# Altium PCB PCB1.PcbDoc
Units mil, origin at the board's own origin, x right, y up, seen from the top; angles counter-clockwise.
Board outline 1579.83 x 2288.5 mil, 2 copper layers (Top Layer, Bottom Layer); 91 components, 54 nets, 254 pads, 104 vias.
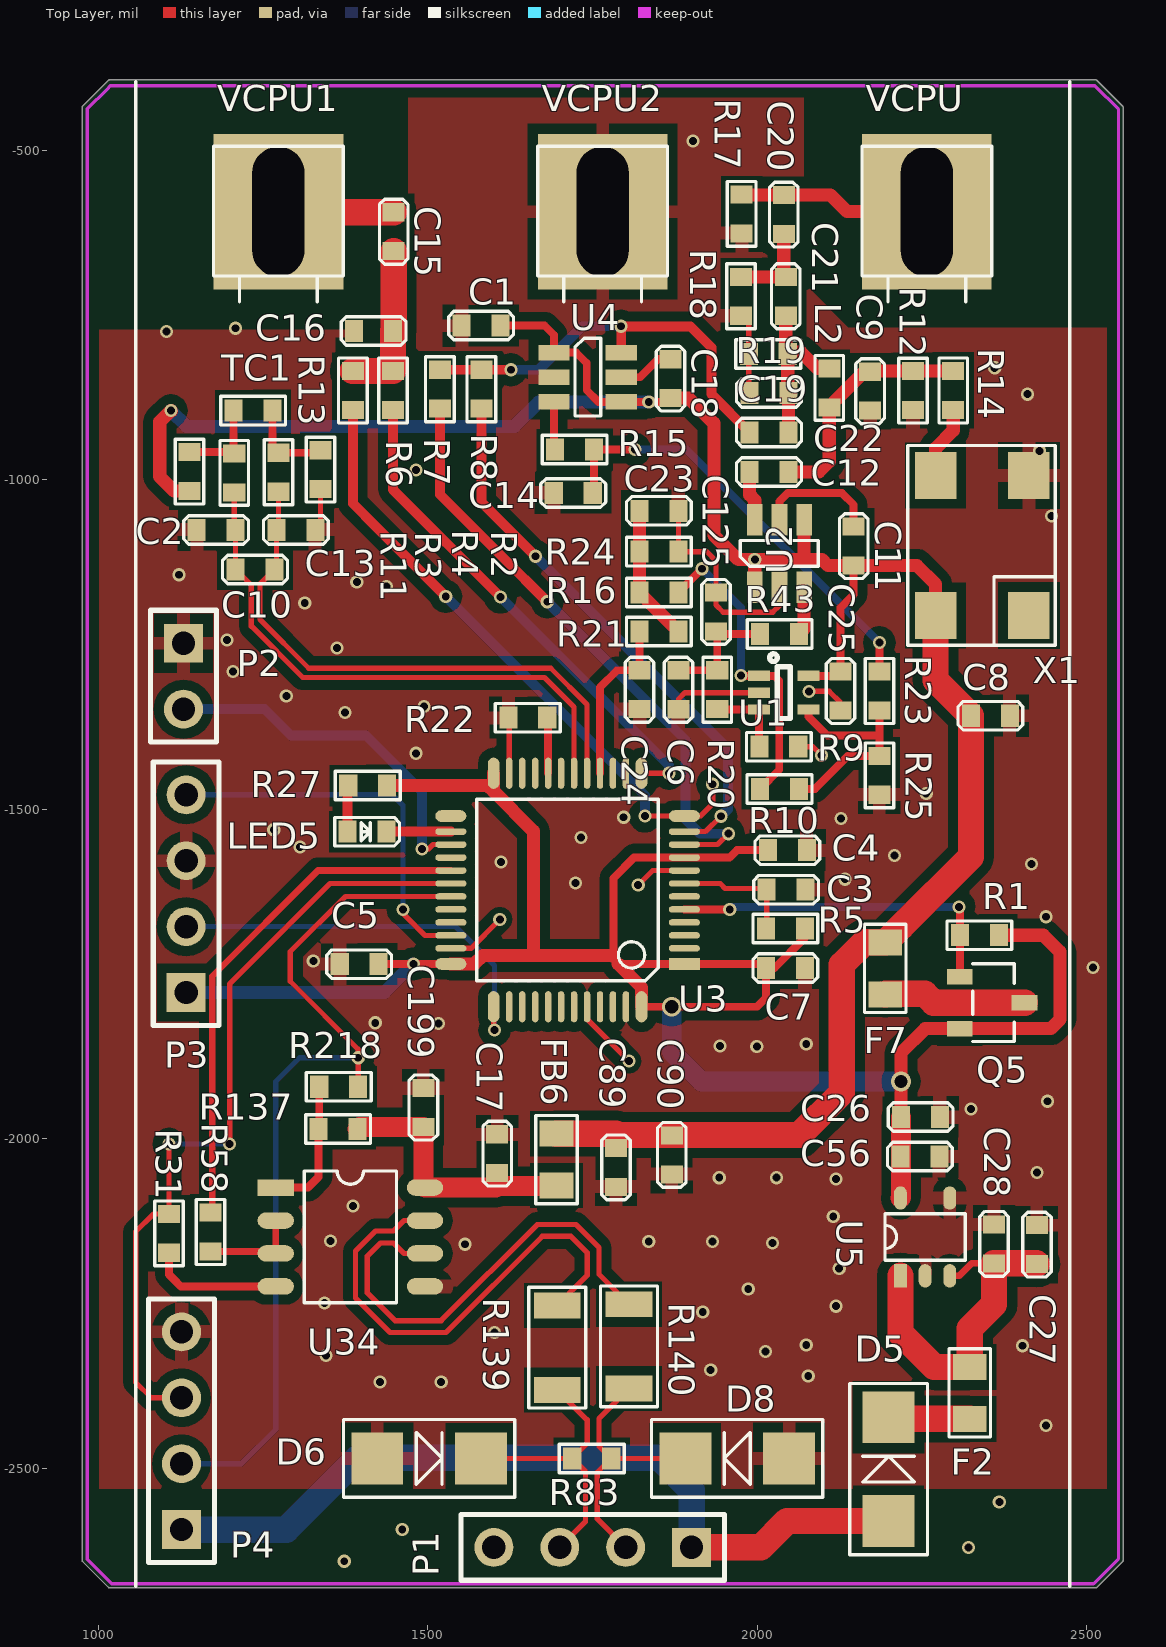
[diagram p0: Top Layer view]
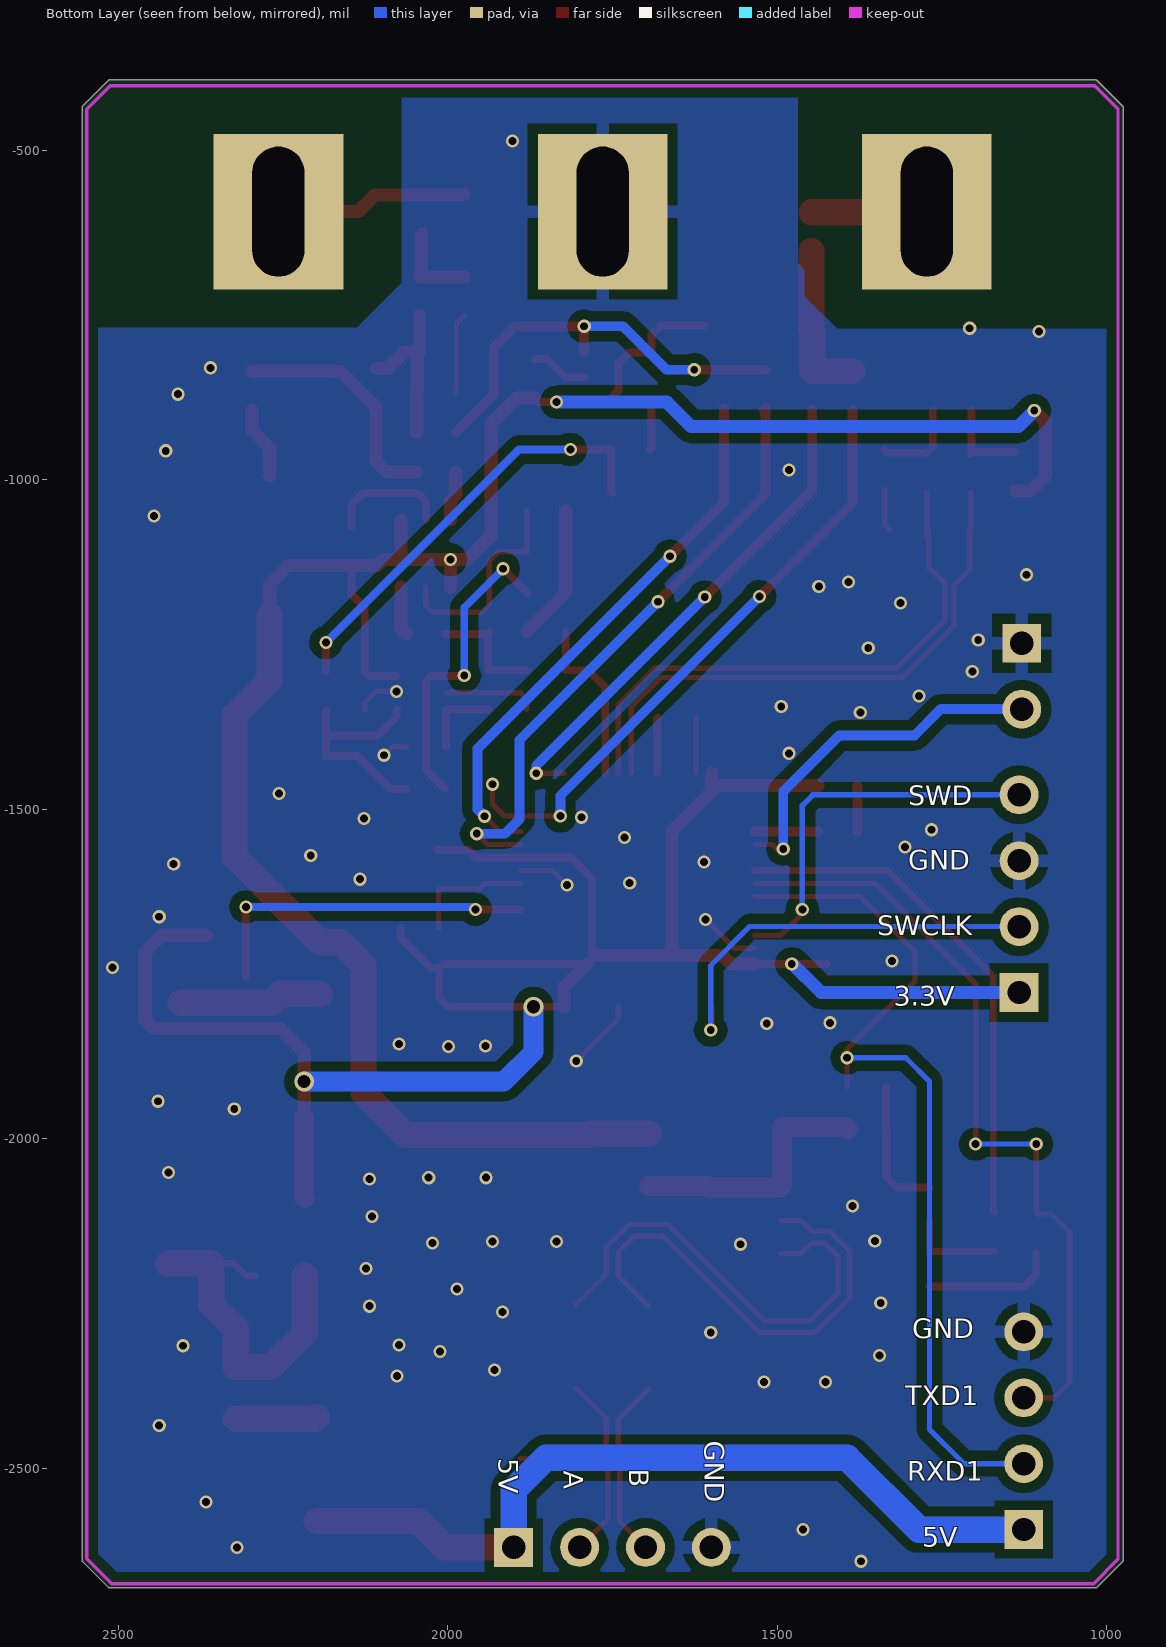
[diagram p1: Bottom Layer view, seen from below]

## Layer stack, top to bottom
Top Layer: signal copper 1.4
Dielectric: dielectric 12.6, FR-4, Dk 4.8
Bottom Layer: signal copper 1.4

## Board outline
975.11,-2639.63 ccw(c977.63,-2639.63) 975.85,-2641.41 1015.22,-2680.78 ccw(c1017,-2679) 1017,-2681.52 2513.06,-2681.52 ccw(c2513.06,-2679) 2514.84,-2680.78 2554.21,-2641.41 ccw(c2552.43,-2639.63) 2554.95,-2639.63 2554.95,-434.9 ccw(c2552.43,-434.9) 2554.21,-433.13 2514.84,-393.76 ccw(c2513.06,-395.53) 2513.06,-393.02 1017,-393.02 ccw(c1017,-395.53) 1015.22,-393.76 975.85,-433.13 ccw(c977.63,-434.9) 975.11,-434.9

## Design rules (kind name [scope] priority, off if disabled: settings)
Clearance Clearance_2 [InNet('+5V')  And InPolygon] p1: gap=12
Clearance Clearance_1 [InPoly And InNet(AGND)] p2: gap=15
Clearance [All] p3: gap=5
DiffPairsRouting [All] p1: maxlimit=10 minlimit=10 mostfreqgap=10 maxuncoupledlength=500
MinimumSolderMaskSliver [All] p1: minsoldermaskwidth=1
PolygonConnect PolygonConnect_1 [IsVia] p1: connectstyle=Direct reliefconductorwidth=10 reliefentries=4 polygonreliefangle="90 Angle"
PolygonConnect [All] p2: connectstyle=Relief reliefconductorwidth=20 reliefentries=4 polygonreliefangle="90 Angle"
RoutingVias [All] p1: holewidth=28 width=50 viastyle="Through Hole" minholewidth=28 minwidth=50 maxholewidth=28 maxwidth=50
SilkToSilkClearance [All] p1: silktosilkclearance=1
SilkscreenOverComponentPads [All] p1: minsilkscreentomaskgap=1
SolderMaskExpansion [All] p1: expansion=4
Width [All] p1: maxlimit=200 minlimit=6 preferedwidth=10
24 further rules are at their usual default settings.

## Classes and differential pairs
component class Sheet1: C1 C2 C6 C8 C9 C10 C11 C12 C13 C14 C15 C16 C18 C19 C20 C21 C22 C23 C24 C25 C125 L2 R2 R3 R4 R6 R7 R8 R9 R10 R11 R12 R13 R14 R15 R16 R17 R18 R19 R20 R21 R23 R24 R25 R43 TC1 U1 U2 U4 VCPU VCPU1 VCPU2 X1
differential pair 4852: +4852_P -4852_N
differential pair 485: +485_P -485_N

## Components (designator, comment, footprint, x,y, rotation, side; value= is the part's Value field where it differs from the comment)
C1 "0.1uF/25V" 0603C 1551,-766 r0 top
C2 "0.1uF/25V" 0603c 1208,-1076 r180 top
C3 "0.1uF/25V" 0603C 2073,-1622 r180 top
C4 "0.1uF/25V" 0603C 2075,-1562 r180 top
C5 "0.1uF/25V" 0603C 1366,-1735 r0 top
C6 "0.01uF/25V" 0603C 1880,-1289 r270 top
C7 "0.1uF/25V" 0603C 2072,-1741 r180 top
C8 "0.1uF/25V" 0603C 2324,-1358 r0 top
C9 "22pF" 0603C 2171,-895 r90 top
C10 "1uF" 0603c 1208,-1136 r0 top
C11 "0.1uF/25V" 0603C 2146,-1130 r90 top
C12 "220pF" 0603C 2047,-988 r180 top
C13 "0.1uF/25V" 0603c 1270,-1076 r0 top
C14 "0.1uF/25V" 0603C 1750,-1020 r180 top
C15 "10pF" 0603C 1448,-653 r90 top
C16 "100PF" 0603C 1447,-774 r180 top
C17 "10uF/25V" 0603C 1605,-1993 r270 top
C18 "0.1uF/25V" 0603C 1868,-876 r90 top
C19 "15pF" 0603C 2047,-868 r180 top
C20 "4700pF" 0603C 2040,-568 r270 top
C21 "4700pF" 0603C 2043,-692 r270 top
C22 "220pF" 0603C 2047,-928 r180 top
C23 "0.01uF/25V" 0603C 1880,-1047 r180 top
C24 "0.01uF/25V" 0603C 1821,-1348 r90 top
C25 "0.1uF/25V" 0603C 2126,-1350 r90 top
C26 "10uF/25V" 0603C 2277,-1967 r180 top
C27 "10uF/25V" 0603C 2424,-2131 r270 top
C28 "0.1uF/25V" 0603C 2359,-2189 r90 top
C56 "0.1uF/25V" 0603C 2217,-2027 r0 top
C89 "10uF/25V" 0603C 1785.23,-2073 r90 top
C90 "0.01uF" 0603C 1870,-2054 r90 top
C125 "0.1uF/25V" 0603C 1937,-1230 r90 top
C199 "0.01uF" 0603C 1493,-1923 r270 top
D5 "SS24" SMA 2199,-2580 r90 top
D6 "SMAJ6.5CA" SMA 1423,-2485 r0 top
D8 "SMAJ6.5CA" SMA 2048,-2485 r180 top
F2 "SMD0805P050" 0805R 2322,-2425 r90 top
F7 "SMD0805P020" 0805R 2194,-1702 r270 top
FB6 "JWWBW2012 M600HT" 0805CZ 1695,-2071 r90 top
L2 "100nH" 0603R 2109,-831 r270 top
LED5 "LED" 0603LED 1378,-1534 r0 top
P1 "Header 4" HDR1X4 1900,-2620 r180 top
P2 "Header 2" HDR1X2 1129,-1248 r270 top
P3 "Header 4" HDR1X4 1133,-1778 r90 top locked
P4 "Header 4" HDR1X4 1126,-2593 r90 top
Q5 "si2343" SOT23-3 2307,-1754 r180 top
R1 "10k" 0603r 2366.31,-1691 r180 top
R2 "499/1%" 0603r 1337,-955 r270 top
R3 "499/1%" 0603r 1206,-1019 r90 top
R4 "499/1%" 0603r 1273,-1018 r90 top
R5 "10K" 0603R 2072,-1681 r180 top
R6 "510" 0603R 1447,-894 r90 top
R7 "100" 0603R 1518,-892 r90 top
R8 "510" 0603R 1581,-892 r90 top
R9 "150K" 0603R 2062,-1405 r180 top
R10 "100K" 0603R 2063,-1469 r180 top
R11 "499/1%" 0603r 1138,-958 r270 top
R12 "51K" 0603r 2236,-835 r270 top
R13 "100" 0603R 1386,-894 r90 top
R14 "150K" 0603r 2297,-894 r90 top
R15 "68K" 0603r 1752,-954 r180 top
R16 "100" 0603R 1880,-1171 r180 top
R17 "10K" 0603r 1976,-567 r270 top
R18 "51K" 0603r 1975,-692 r270 top
R19 "100K" 0603r 2046,-809 r180 top
R20 "51K" 0603R 1939,-1348 r90 top
R21 "100" 0603R 1880,-1230 r180 top
R22 "10K" 0603R 1681,-1361 r180 top
R23 "51K" 0603R 2185,-1350 r90 top
R24 "150K" 0603R 1880,-1109 r180 top
R25 "51K/NC" 0603R 2185,-1478 r90 top
R27 "1K" 0603R 1379,-1464 r0 top
R31 "1K" 0603R 1107,-2173 r90 top
R43 "68K" 0603r 2004,-1234 r0 top
R58 "1K" 0603R 1170,-2171 r90 top
R83 "100" 0603R 1778,-2485 r180 top
R137 "100k" 0603R 1334,-1985 r0 top
R139 "10" 1206R 1696,-2381 r90 top
R140 "10" 1206R 1805,-2379 r90 top
R218 "1K" 0603R 1335,-1921 r0 top
TC1 "THERMOCOUPLE" 0603R 1205,-895 r0 top
U1 "OPA837 DCK" SC70-5 2040,-1323 r0 top
U2 "ltc5507es6" SOT23-6 1996,-1163 r0 top
U3 "STM32F103C8T6" TQFP-48 1889,-1711 r180 top
U4 "ltc5507es6" SOT23-6 1691,-807 r270 top
U5 "TLV70233DBVR" SOT23-5(DBV) 2217,-2208 r90 top
U34 "THVD1500" so-8 1269,-2074 r0 top
VCPU "VCPU" probe 2257,-593 r0 top locked
VCPU1 "VCPU" probe 1273,-593 r0 top locked
VCPU2 "VCPU" probe 1765,-593 r0 top locked
X1 "PXETCLJANF-80.000000" XTAL4TN_7050 2412,-1206 r90 top

## Footprints (in the part's own frame and the unit in brackets; to place one, negate y for a bottom-side part, rotate by r counter-clockwise, add the part's x,y. Pads: shape width x height; smd on the part's side, far side on the other; paste and mask are expansions set on the pad)
0603C [mm]
  rect 0.7x0.85 smd: 1(0,0) 2(1.5,0)
  silkscreen extent -0.5,-0.55 2,0.55
0603c [mm]
  rect 0.7x0.85 smd: 1(0,0) 2(1.5,0)
  silkscreen extent -0.5,-0.55 2,0.55
0603LED [mm]
  rect 0.7x0.85 smd: 1(0,0) 2(1.5,0)
  silkscreen extent -0.5,-0.55 2,0.55
0603R [mm]
  rect 0.7x0.85 smd: 1(0,0) 2(1.5,0)
  silkscreen extent -0.5,-0.55 2,0.55
0603r [mm]
  rect 0.7x0.85 smd: 1(0,0) 2(1.5,0)
  silkscreen extent -0.5,-0.55 2,0.55
0805CZ [mm]
  rect 1x1.3 smd: 1(0,0) 2(2,0)
  silkscreen extent -0.7,-0.8 2.7,0.8
0805R [mm]
  rect 1x1.3 smd: 1(0,0) 2(2,0)
  silkscreen extent -0.7,-0.8 2.7,0.8
1206R [mm]
  rect 1x1.8 smd: 1(0,0) 2(3.25,0)
  silkscreen extent -0.7,-1.1 3.95,1.1
HDR1X2 [mm] "Connector; Header; 2 Position"
  rect 1.5x1.5 hole 0.9: 1(0,0)
  round 1.5 hole 0.9: 2(2.54,0)
  silkscreen extent -1.27,-1.27 3.81,1.27
HDR1X4 [mm] "Connector; Header; 4 Position"
  rect 1.5x1.5 hole 0.9: 1(0,0)
  round 1.5 hole 0.9: 2(2.54,0) 3(5.08,0) 4(7.62,0)
  silkscreen extent -1.27,-1.27 8.89,1.27
probe [mm]
  rect 5x6 hole 2 slot 5 at 90 deg unplated: 1(0,0)
SC70-5 [mm] "SC70 6-Leads, Body 2.0x1.25mm, Pitch 0.65mm"
  rect 0.85x0.4 smd mask+0.05: 1(-0.95,0.65) 2(-0.95,0) 3(-0.95,-0.65) 4(0.95,-0.65) 5(0.95,0.65)
  silkscreen extent -0.55,-1 0.25,1.5, body extent -0.63,-1 0.63,1, height 1.45
SMA [mm]
  rect 2x2 smd: 1(0,0) 2(4,0)
  silkscreen extent -1.3,-1.5 5.3,1.5
so-8 [mil]
  rect 55x25 smd: 1(0,0)
  oval 55x25 smd: 2(0,-50) 3(0,-100) 4(0,-150) 5(226.38,-150) 6(226.38,-100) 7(226.38,-50) 8(226.38,0)
  silkscreen extent 43,-175 183,25
SOT23-3 [mm]
  rect 1x0.6 smd: 1(0,0) 2(0,2) 3(-2.5,1)
  silkscreen extent -2.1,-0.5 -0.5,2.5
SOT23-5(DBV) [mm]
  rect 0.9x0.5 smd: 1(0,0)
  oval 0.9x0.5 smd: 2(0,-0.95) 3(0,-1.9) 4(3,-1.9) 5(3,0)
  silkscreen extent 0.6,-2.5 2.4,0.6
SOT23-6 [mm]
  rect 0.6x1.2 smd: 1(0,0) 2(0.95,0) 3(1.9,0) 4(1.9,2.6) 5(0.95,2.6) 6(0,2.6)
  silkscreen extent -0.56,0.81 2.44,1.8
TQFP-48 [mm]
  rect 1.2x0.45 smd: 1(0,0.6)
  oval 1.2x0.25 smd: 2(0,0) 3(0,-0.5) 4(0,-1) 5(0,-1.5) 6(0,-2) 7(0,-2.5) 8(0,-3) 9(0,-3.5) 10(0,-4) 11(0,-4.5) 26(9,-4.5) 27(9,-4) 28(9,-3.5) 29(9,-3) 30(9,-2.5) 31(9,-2) 32(9,-1.5) 33(9,-1) 34(9,-0.5) 35(9,0)
  oval 1.2x0.45 smd: 12(0,-5.1) 25(9,-5.1) 36(9,0.6)
  oval 0.45x1.2 smd: 13(1.65,-6.75) 24(7.35,-6.75) 37(7.35,2.25) 48(1.65,2.25)
  oval 0.25x1.2 smd: 14(2.25,-6.75) 15(2.75,-6.75) 16(3.25,-6.75) 17(3.75,-6.75) 18(4.25,-6.75) 19(4.75,-6.75) 20(5.25,-6.75) 21(5.75,-6.75) 22(6.25,-6.75) 23(6.75,-6.75) 38(6.75,2.25) 39(6.25,2.25) 40(5.75,2.25) 41(5.25,2.25) 42(4.75,2.25) 43(4.25,2.25) 44(3.75,2.25) 45(3.25,2.25) 46(2.75,2.25) 47(2.25,2.25)
  silkscreen extent 1,-5.75 8,1.25
XTAL4TN_7050 [mm]
  rect 1.8x1.6 smd: 1(0,0) 2(5.4,0) 3(5.4,3.6) 4(0,3.6)
  silkscreen extent -1.14,-1.02 6.55,4.67

## Part data
C1 C2 C3 C4 C5 C6 C7 C8 C10 C13 C15 C16 C23 C24 C25: library part CAP, "Capacitor"
C9 C11 C12 C14 C17 C18 C19 C20 C21 C22 C89 C90 C125 C199: library part C, "C"
C26 C27 C28 C56: library part Cap, "Capacitor"
D5: library part "Diode 1N4148", "High Conductance Fast Diode"
D6 D8: library part "DIODE S", "Schottky Diode"
F2: library part "Fuse 2", "Fuse"
F7: library part "Fuse 1", "Fuse"
FB6: library part FB
L2: library part INDUCTOR_1
P1 P3 P4: "Header, 4-Pin"
P2: "Header, 2-Pin"
Q5: library part BUK92150-55A, "BUK92150-55A"
R1: library part Res1, "Resistor"
R2 R3 R4 R11 R27: library part RES1
R5 R6 R7 R8 R9 R13 R20 R22 R23 R25: library part Res3, "Resistor"
R10 R12 R14 R15 R16 R17 R18 R19 R21 R24 R31 R43 R58 R83 R218: library part R, "R"
R137 R139 R140: library part RES2
U3: "STM32 ARM-based 32-bit MCU with 64 Kbytes Flash, 48-pin LQFP, Industrial Temperature"
U5: library part TLV70230DBVR
U34: library part SN65HVD06D
VCPU VCPU1 VCPU2: library part T_POINT_R
X1: library part XTAL4S

## Via types
v1: diameter 20, hole 12, Top Layer to Bottom Layer, tented both sides, 102 vias
v2: diameter 30, hole 20, Top Layer to Bottom Layer, tented both sides, 2 vias

## Nets (pads, with @x,y where several pads share a name; then routed paths per layer and width w, separated by ;. In a path a pad name is that pad's centre, name@x,y a point inside that pad or via, vN(x,y) a via of type N, cw(c..) or ccw(c..) an arc to the next point about the centre after c; other vN are vias at no path point)
485_3.3V1: C17.2 C199.2 FB6.1 R137.2 U34.8 | length 395
  Top Layer w30: R137.2 1396,-1982.06 C199.2 1493,-2071.62 U34.8 1602.74,-2074 1605,-2071.74 1694.26,-2071.74 FB6.1
485_EN1: R58.2 U3.29 | length 788.2
  Top Layer w10: R58.2 1172.53,-2109.42 1172.53,-1753.47 1333.11,-1592.89 U3.29
485_N: D6.2 P1.3 R83.2 R139.1 | length 430.1
  Top Layer w8: D6.2 R83.2 ; R139.1 1741.5,-2426.5 1741.5,-2462.44 R83.2 ; P1.3 1739,-2581 1739,-2505.06 R83.2
485_P: D8.2 P1.2 R83.1 R140.1 | length 419.5
  Top Layer w8: 1759.5,-2462 1759.5,-2449 ; P1.2 1757,-2577 1757,-2506 R83.1 ; R140.1 1759.5,-2424.5 1759.5,-2449 ; D8.2 R83.1 ; 1759.5,-2449 1759.5,-2466.5 R83.1
4852_N: R140.2 U34.6 | length 707
  Top Layer w8: U34.6 1463.77,-2174 1447.77,-2158 1428,-2158 1408,-2178 1408,-2234 1450,-2276 1520,-2276 1666,-2130 1724.46,-2130 1759.5,-2165.04 1759.5,-2205.55 R140.2
4852_P: R139.2 U34.7 | length 738.9
  Top Layer w8: U34.7 1463.77,-2124 1447.77,-2140 1420.54,-2140 1390,-2170.54 1390,-2241.46 1442.54,-2294 1527.46,-2294 1673.46,-2148 1717,-2148 1741.5,-2172.5 1741.5,-2207.55 R139.2
AGND: C1.1 C2.2 C3.1 C4.1 C5.1 C6.2 C7.1 C8.2 C9.1 C13.2 C14.2 C16.2 C17.1 C19.2 C23.1 C24.1 C25.1 C26.1 C27.1 C28.2 C56.2 C89.1 C90.1 C125.2 C199.1 D6.1 D8.1 P1.4 P2.1 P3.3 P4.4 R2.2 R9.1 R12.2 R17.2 R18.2 R19.2 R22.2 R24.1 R25.1 U1.2 U2.2 U3.8 U3.23 U3.35 U3.44 U3.47 U4.2 U5.2 U5.4 U34.5 VCPU2.1 X1.2 | length 1151
  Top Layer w8: C13.2 1337,-1068.06 R2.2 ; 1559,-1711 U3.35 1565,-1711 v1(1609,-1667) ; R22.2 1623.25,-1362.31 U3.23 ; U3.44 1741.36,-1818.36 v1(1805,-1882) ; v1(1819,-1615) 1841.11,-1592.89 U3.8 ; C6.2 1880,-1333 1890,-1323 U1.2 ; C23.1 R24.1 1923,-1109 1937,-1123 C125.2 1937,-1190 1948,-1201 2023,-1201 2033.4,-1190.6 U2.2 ; R18.2 1986.94,-763 R19.2 1986.94,-867 C19.2 ; R9.1 2084,-1405 v1(2097,-1418) ; v1(2078,-1321) 2109,-1321 2126,-1338 C25.1
  other v1: 1373,-2641 2320,-2620 1461,-2593 2367,-2551 2438,-2435 1427,-2369 1520,-2369 2077,-2360 1929,-2351 1345,-2329 2012,-2323 2402,-2314 2074,-2313 1601,-2294 1917,-2263 2119,-2254 1343,-2249 1986,-2228 2124,-2197 1556,-2160 2023,-2158 1835,-2156 1932,-2156 1352,-2155 2115,-2118 1386,-2102 2119,-2061 1942,-2059 2029,-2059 2424,-2051 2324,-1955 2440,-1943 1999,-1860 1943,-1859 2074,-1856 1516,-1825 1420,-1824 2509,-1740 1326,-1730 2438,-1663 1724,-1612 2133,-1606 2416,-1583 1611,-1580 2208,-1570 1306,-1557.01 1732,-1543 1266,-1531 2127,-1514 1797,-1512 2256,-1476 1482,-1415 1374,-1353 1494,-1344 1285,-1328 1204,-1291 1362,-1255 1195,-1243 1313,-1187 1437,-1162 1392,-1155 1122,-1144 2446,-1055 1482,-985 2428,-956 2409.63,-870.01 2360,-830 1103,-775 1208,-770 1902,-485.89
FB_B: C15.1 C16.1 R6.2 R13.2 | length 243.4
  Top Layer w40: R13.2 R6.2 C16.1 1448,-773 C15.1
FDR_ADC_A: C24.2 R21.2 U3.16 | length 260
  Top Layer w12: U3.16 1761.05,-1360 1761.05,-1314.95 1787.06,-1288.94 C24.2 C24.2 R21.2
NetC3_2: C3.2 R5.2 U3.7 | length 188.3
  Top Layer w8: U3.7 1943.57,-1612.57 1951,-1620 2011.94,-1620 C3.2 2013.94,-1680 R5.2
NetC9_2: C9.2 C12.1 L2.2 R12.1 R14.2 | length 362
  Top Layer w20: C12.1 2093,-988 2109,-972 L2.2 2109,-889 2162.06,-835.94 C9.2 2171.94,-835 R12.1 2236.06,-834.94 R14.2
NetC11_2: C11.2 U2.5 | length 186.3
  Top Layer w12: U2.5 2033.4,-1032.6 2046,-1020 2128,-1020 2146,-1038 C11.2
NetC12_2: C12.2 U2.6 | length 76
  Top Layer w20: C12.2 1987.94,-1022.94 1996,-1031 U2.6
NetC15_2: C15.2 VCPU1.1 | length 175.4
  Top Layer w40: VCPU1.1 1273.94,-593.94 C15.2
NetC18_2: C18.2 U4.5 | length 86
  Top Layer w12: U4.5 1821.6,-844.4 1849.06,-816.94 C18.2
NetC19_1: C19.1 C21.2 C22.1 L2.1 R19.1 | length 255
  Top Layer w20: C21.2 R19.1@2043,-806 ; C22.1 C19.1 2046,-867 R19.1 R19.1@2043,-806 ; L2.1 2091,-831 2066,-806 R19.1@2043,-806
NetC20_1: C20.1 R17.1 VCPU.1 | length 291.8
  Top Layer w20: R17.1 1977,-568 C20.1 2111,-568 2136,-593 VCPU.1
NetC20_2: C20.2 C21.1 R18.1 | length 134.2
  Top Layer w20: R18.1 C21.1 2040,-689 C20.2
NetC22_2: C22.2 R7.2 R8.2 U4.6 | length 645.2
  Top Layer w15: R7.2 R8.2 v1(1625.94,-832.94) ; v1(1793,-767) v1@1793.36,-767.36 ; U4.6 v1@1793.36,-767.36 ; C22.2 1930,-870.06 1930,-799 1898.36,-767.36 v1@1793.36,-767.36
  Bottom Layer w15: v1(1625.94,-832.94) 1668.06,-832.94 1734,-767 v1(1793,-767)
NetC23_2: C23.2 R16.2 R21.1 R24.2 | length 207.5
  Top Layer w20: C23.2 R24.2 R16.2 R21.1 R21.1
NetC27_2: C27.2 C28.1 F2.2 U5.1 U5.3 | length 526.3
  Top Layer w10: U5.3 2306,-2208 2325,-2189 C28.1
  Top Layer w40: U5.1 2217,-2295 2268.26,-2346.26 F2.2 2322,-2288 2359,-2251 C28.1 2422.94,-2189 C27.2
NetD5_2: D5.2 F2.1 | length 124
  Top Layer w40: D5.2 2201.48,-2425 F2.1
NetF7_2: F7.2 Q5.3 | length 217.3
  Top Layer w40: F7.2 2194.74,-1780 2254,-1780 2267.37,-1793.37 Q5.3
NetLED5_1: LED5.1 R27.1 | length 70.4
  Top Layer w15: LED5.1 1378,-1465 R27.1
NetLED5_2: LED5.2 U3.26 | length 97.7
  Top Layer w15: LED5.2 1437.22,-1533.83 U3.26
NetP2_2: P2.2 U3.27 | length 547.1
  Top Layer w8: v1(1491,-1560) 1501,-1560 1507.48,-1553.52 U3.27
  Bottom Layer w15: P2.2 1252,-1348 1292,-1388 1406,-1388 1491,-1473 v1(1491,-1560)
NetR2_1: R2.1 R4.2 TC1.2 | length 133.3
  Top Layer w12: TC1.2 1264.06,-950 R4.2 1333.06,-958.94 R2.1
NetR3_2: R3.2 R11.1 TC1.1 | length 132.8
  Top Layer w12: R11.1 1204.06,-958 R3.2@1205,-958.94 ; TC1.1 R3.2@1205,-958.94 ; R3.2 R3.2@1205,-958.94
NetR9_2: R9.2 R20.1 U1.3 | length 120.4
  Top Layer w12: R20.1 1939.59,-1348.59 U1.3 2002.6,-1404.65 R9.2
NetR10_1: R10.1 R23.1 R25.2 U1.4 | length 341.9
  Top Layer w12: R10.1 2087,-1469 2137.06,-1418.94 R25.2 2185,-1388 ; U1.4 2077.4,-1359.4 2106,-1388 2185,-1388 ; R23.1 2185,-1388
NetR10_2: R10.2 R16.1 U1.1 | length 474.7
  Top Layer w12: R16.1 v1(1916,-1135) ; v1(1975,-1297) 1975.41,-1297.41 U1.1 2025.41,-1297.41 2033,-1305 2033,-1439.94 R10.2
  Bottom Layer w12: v1(1916,-1135) 1975,-1194 v1(1975,-1297)
NetR14_1: R14.1 X1.3 | length 110.5
  Top Layer w20: X1.3 2270.27,-951.73 2297,-925 R14.1
NetR15_2: R15.2 U4.3 | length 73
  Top Layer w12: U4.3 1691,-952.06 R15.2
NetR22_1: R22.1 U3.20 | length 84.8
  Top Layer w12: R22.1 1682.31,-1362.31 U3.20
NetR31_1: R31.1 U34.4 | length 219.4
  Top Layer w12: R31.1 1107,-2206 ; 1119,-2218 1107,-2206 ; U34.4 1125,-2224 1107,-2206
NetR43_2: R43.2 U2.3 | length 74.2
  Top Layer w20: R43.2 2070.8,-1226.25 U2.3
NetR58_1: R58.1 U34.2 U34.3 | length 148.5
  Top Layer w10: R58.1 U34.3@1266,-2171 ; U34.3 U34.3@1266,-2171 ; U34.2 1269,-2168 U34.3@1266,-2171
NetR137_1: R137.1 R218.1 U34.1 | length 209
  Top Layer w12: U34.1 1318,-2074 1334,-2058 R137.1 1335,-1984 R218.1
PWM_A1: R7.1 U3.10 | length 941
  Top Layer w8: U3.10 1939.48,-1553.52 v1(1956,-1537)
  Top Layer w15: R7.1@1520.5,-894.5 R7.1 1518,-1022 1520.5,-1024.5 1611.5,-1115.5 ; 1603,-1107 1611.5,-1115.5 ; v1(1681,-1185) 1611.5,-1115.5
  Bottom Layer w15: v1(1681,-1185) 1891,-1395 1891,-1515 1913,-1537 v1(1956,-1537)
PWM_A2: R8.1 U3.11 | length 907.9
  Top Layer w8: U3.11 1921.17,-1533.83 v1(1944.47,-1510.53)
  Top Layer w15: R8.1 1581,-1034 v1(1663,-1116)
  Bottom Layer w15: v1(1663,-1116) 1955,-1408 1955,-1433 ; v1(1944.47,-1510.53) 1955,-1500 1955,-1433 ; 1955,-1498 1955,-1433
PWM_B1: R13.1 U3.12 | length 940.4
  Top Layer w8: v1@1829,-1510 v1(1829.21,-1510.21) U3.12 1913.79,-1510.21 1932,-1492 v1(1932,-1462)
  Top Layer w15: R13.1 1386,-1036 1420.5,-1070.5 1426.53,-1076.53 v1(1527,-1177)
  Bottom Layer w15: v1(1527,-1177) 1829.21,-1479.21 v1(1829.21,-1510.21)
PWM_B2: R6.1 U3.13 | length 766.4
  Top Layer w8: U3.13 v1(1865.75,-1445.25)
  Top Layer w15: R6.1 1447,-1015 v1(1610,-1178)
  Bottom Layer w15: v1(1610,-1178) 1865.75,-1433.75 v1(1865.75,-1445.25)
PWR_EN: Q5.1 R1.2 U3.5 | length 525.3
  Top Layer w12: U3.5 1957.94,-1651.95 v1(1958,-1652) ; v1(2306,-1648) 2307.26,-1649.26 R1.2 2307.26,-1753.74 Q5.1
  Bottom Layer w12: v1(1958,-1652) 1962,-1648 v1(2306,-1648)
RXD1: P4.2 R218.2 U3.31 | length 1358.5
  Top Layer w8: R218.2 v1(1394.06,-1877) 1394.06,-1864.06 1291,-1761 1291,-1716 1374.74,-1632.26 U3.31
  Bottom Layer w8: P4.2 1217,-2493 1269,-2441 1269,-1913 1305,-1877 v1(1394.06,-1877)
SWCLK: P3.2 U3.37 | length 626.4
  Top Layer w8: U3.37 1599.63,-1833.63 v1(1601,-1835)
  Bottom Layer w8: P3.2 1542,-1678 1601,-1737 v1(1601,-1835)
SWD: P3.4 U3.34 | length 586.1
  Top Layer w8: v1(1462,-1652) 1462,-1658 1495.31,-1691.31 U3.34
  Bottom Layer w8: P3.4 1446,-1478 1462,-1494 v1(1462,-1652)
T_A: C2.1 C10.1 R3.1 U3.18 | length 853.6
  Top Layer w8: R3.1 1206,-1074 C2.1 C10.1@1208,-1135 ; C10.1 1232,-1160 1232,-1222 1310,-1300 1676.68,-1300 1721.68,-1345 U3.18
T_B: C10.2 C13.1 R4.1 U3.17 | length 873.6
  Top Layer w8: C13.1 C13.1@1270,-1090 ; R4.1 1273,-1087 C13.1@1270,-1090 ; U3.17 1741.36,-1341 1686.36,-1286 1319,-1286 1245,-1212 1245,-1158.06 C10.2 1270,-1133.06 C13.1@1270,-1090
TXD1: P4.3 R31.2 U3.30 | length 1209.4
  Top Layer w8: v1(1107,-2008) R31.2 1083.43,-2113.94 1056.37,-2141 1056.37,-2369.37 1080,-2393 P4.3 ; v1(1199,-2008) 1199,-1765 1351.42,-1612.57 U3.30
  Bottom Layer w8: v1(1107,-2008) v1(1199,-2008)
U1: C6.1 C125.1 R20.2 R43.1 | length 184.6
  Top Layer w12: C6.1 1938.94,-1289 R20.2 C125.1@1939,-1232 ; C125.1 C125.1@1939,-1232 ; R43.1 1941,-1234 C125.1@1939,-1232
U2: C14.1 R15.1 R23.2 | length 665.1
  Top Layer w12: C14.1 1752,-1018 R15.1 v1(1814,-954) ; R23.2 v1(2185,-1247)
  Bottom Layer w12: v1(1814,-954) 1892,-954 v1(2185,-1247)
VCC: D5.1 P1.1 P4.1 | length 1242
  Top Layer w40: P1.1 2005,-2620 2045,-2580 D5.1
  Bottom Layer w40: P4.1 1285,-2593 1394,-2484 1851,-2484 1900,-2533 P1.1
VCC_3.3V: C4.2 C5.2 C7.2 C26.2 C56.1 P3.1 Q5.2 R1.1 R5.1 R27.2 U3.1 U3.9 U3.24 U3.36 U3.48 U5.5 | length 3340.5
  Top Layer w12: C5.2 1425.43,-1734.62 v1(1478,-1734.62) U3.36 ; 1775.79,-1722 1781.39,-1727.61 ; U3.48 v2(1870,-1799.58) 1999.42,-1799.58 2013,-1786 2013,-1741.06 C7.2 ; C4.2 1969,-1562 1957.8,-1573.2 U3.9 1812.8,-1573.2 1781.39,-1604.61 1781.39,-1727.61 ; R5.1 2072,-1694.65 2025.65,-1741 C7.2 ; 1781.39,-1727.61 1788.41,-1734.62 U3.1 2006.57,-1734.62 C7.2
  Top Layer w20: R27.2 1591,-1464 1599.63,-1472.63 ; U3.36 1570.38,-1734.62 1583,-1722 1660,-1722 ; U3.24 1599.63,-1472.63 ; 1775.79,-1722 1660,-1722 ; 1788.41,-1734.62 1824.04,-1770.25 U3.48 ; C26.2 2217.94,-1869.06 2254.26,-1832.74 Q5.2 2445.26,-1832.74 2459,-1819 2459,-1716 2434,-1691 R1.1 ; 1599.63,-1472.63 1660,-1533 1660,-1722
  Top Layer w30: U5.5 2217.94,-2088.94 C26.2
  Bottom Layer w20: P3.1 1433.62,-1778 v1@1477,-1734.62
  Bottom Layer w30: v2(1870,-1799.58) 1870,-1868 1915,-1913 v2(2218,-1913)
VCC_3.3V_E: C1.2 C8.1 C11.1 C18.1 C25.2 C89.2 C90.2 F7.1 FB6.2 R11.2 U1.5 U2.1 U2.4 U4.1 U4.4 X1.4 | length 3555.5
  Top Layer w12: C1.2 1677,-766 1691,-780 U4.1 1725,-807 1741,-823 1741,-864 1758.8,-881.8 U4.4 1862.2,-881.8 C18.1 ; U1.5 2119.54,-1297.41 C25.2 2126,-1194 2146,-1174 C11.1
  Top Layer w20: v1@1110.35,-895.35 v1(1110,-895) 1093,-912 1093,-995 1115.06,-1017.06 R11.2 ; C18.1 1896,-876 1934,-914 1934,-982 1934,-1084 1971,-1121 v1(1996,-1121) ; U2.1 v1(1996,-1121) ; U2.4 2070.8,-1120.2 2070,-1121 ; X1.4 2270.27,-1158.27 2242,-1130 C11.1 2107,-1130 2098,-1121 2070,-1121 ; v1(1996,-1121) 2070,-1121
  Top Layer w40: FB6.2 1785.23,-1992.26 ; 1785.23,-1994.26 2063.74,-1994.26 2128,-1930 2128,-1736 2162,-1702 F7.1 2218,-1678 2324,-1572 C8.1 2270.27,-1304.27 X1.4
  Bottom Layer w20: v1(1110,-895) 1133.83,-918.83 1631,-918.83 1667.83,-882 v1(1835,-882)
pads on no net: U3.2 U3.3 U3.4 U3.6 U3.14 U3.15 U3.19 U3.21 U3.22 U3.25 U3.28 U3.32 U3.33 U3.38 U3.39 U3.40 U3.41 U3.42 U3.43 U3.45 U3.46 X1.1

## Polygon pours and split planes (outlines as drawn)
AGND on Top Layer "Mid-Layer 1-No Net" (solid, remove dead copper, pour order 1000): 791.48,10 864.48,-63 2681.48,-63 2681.48,-2539 2841.48,-2699 2673.48,-2531 908.48,-2531 908.48,-85 948.48,-45
AGND on Bottom Layer "Mid-Layer 1-No Net" (solid, remove dead copper, pour order 1001): 326.29,-154.33 454.29,-282.33 2768.29,-282.33 2768.29,-2700.33 2645.29,-2823.33 2640.29,-2828.33 1427.29,-2828.33 463.29,-2828.33 231.29,-2596.33 640.29,-2187.33 640.29,-241.33

## Keep-outs
Keep-Out Layer:
  lines w5: 983,-2638 983,-437 1013,-407 1017.95,-402.05 2512.05,-402.05 2548,-438 2548,-2637 2510,-2675 1020,-2675 983,-2638

## Other copper
Top Layer:
  pour cut-out: 2070,-409 2502,-409 2504,-407 2550,-453 2550,-669 2540,-679 2540,-769 2138,-769 2070,-701
  pour cut-out: 990,-412 1422,-412 1462,-372 1470,-380 1470,-672 1460,-682 1460,-722 1410,-772 990,-772
Bottom Layer:
  pour cut-out: 989.06,-411.06 1421.06,-411.06 1469.06,-363.06 1469.06,-671.06 1459.06,-681.06 1459.06,-721.06 1409.06,-771.06 989.06,-771.06
  pour cut-out: 2070,-409 2502,-409 2504,-407 2550,-453 2550,-669 2540,-679 2540,-769 2138,-769 2070,-701

## Silkscreen, mask and mechanical layers (free items; w line width, h text height)
Top Overlay:
  lines w5: 1056.37,-2679 1056.37,-395.53 ; 1213.85,-730.18 1213.85,-690.81 ; 1331.96,-730.18 1331.96,-690.81 ; 1705.98,-730.18 1705.98,-690.81 ; 1824.09,-730.18 1824.09,-690.81 ; 2198.1,-730.18 2198.1,-690.81 ; 2316.21,-730.18 2316.21,-690.81 ; 2473.69,-2679 2473.69,-395.53 ; 1174.48,-690.81 1174.48,-493.96 1371.33,-493.96 1371.33,-690.81 1174.48,-690.81 ; 1666.61,-690.81 1666.61,-493.96 1863.46,-493.96 1863.46,-690.81 1666.61,-690.81 ; 2158.73,-690.81 2158.73,-493.96 2355.58,-493.96 2355.58,-690.81 2158.73,-690.81
Bottom Overlay:
  text "SWD" at 1301,-1494 h30
  text "GND" at 1301,-1592 h30
  text "SWCLK" at 1348,-1691 h30
  text "3.3V" at 1323,-1798 h30
  text "GND" at 1295,-2303 h30
  text "TXD1" at 1306,-2404 h30
  text "GND" at 1610,-2458 h30 r90
  text "5V" at 1923,-2485 h30 r90
  text "B" at 1725,-2501 h30 r90
  text "A" at 1824,-2504 h30 r90
  text "RXD1" at 1303,-2519 h30
  text "5V" at 1280,-2619 h30
Mechanical 1:
  lines w5: 977.63,-2639.63 977.63,-434.9 ; 977.63,-2639.63 1017,-2679 ; 977.63,-2639.63 1017,-2679 ; 977.63,-2639.63 977.63,-434.9 ; 977.63,-434.9 1017,-395.53 ; 977.63,-434.9 1017,-395.53 ; 1017,-2679 2513.06,-2679 ; 1017,-2679 2513.06,-2679 ; 1017,-395.53 1338,-395.53 1017,-395.53 ; 2513.06,-2679 2552.43,-2639.63 ; 2513.06,-2679 2552.43,-2639.63 ; 2513.06,-395.53 2552.43,-434.9 ; 2513.06,-395.53 2316.21,-395.53 2513.06,-395.53 ; 2513.06,-395.53 2552.43,-434.9 ; 2552.43,-2639.63 2552.43,-434.9 ; 2552.43,-2639.63 2552.43,-434.9 ; 1331.96,-395.53 1840,-395.53 1331.96,-395.53 ; 1824.09,-395.53 2336,-395.53 1824.09,-395.53
Mechanical 7:
  circle w2.5: c10233.85,-3151.18 r1.25
  circle w2.5: c11808.65,-3151.18 r1.25
  circle w2.5: c10273.22,-3190.55 r1.25
Mechanical 12:
  circle w5: c11021.25,-3033.07 r29.53
  circle w5: c11121.25,-3033.07 r29.53
  circle w5: c11221.25,-3033.07 r29.53
  circle w5: c11321.25,-3033.07 r29.53
  circle w5: c10921.25,-3033.07 r29.53
  circle w5: c10821.25,-3033.07 r29.53
  circle w5: c10721.25,-3033.07 r29.53